# EAGLE board Qwiic Pi SHIM_S2-Panel (EAGLE 9.5.1), part 1 of 2
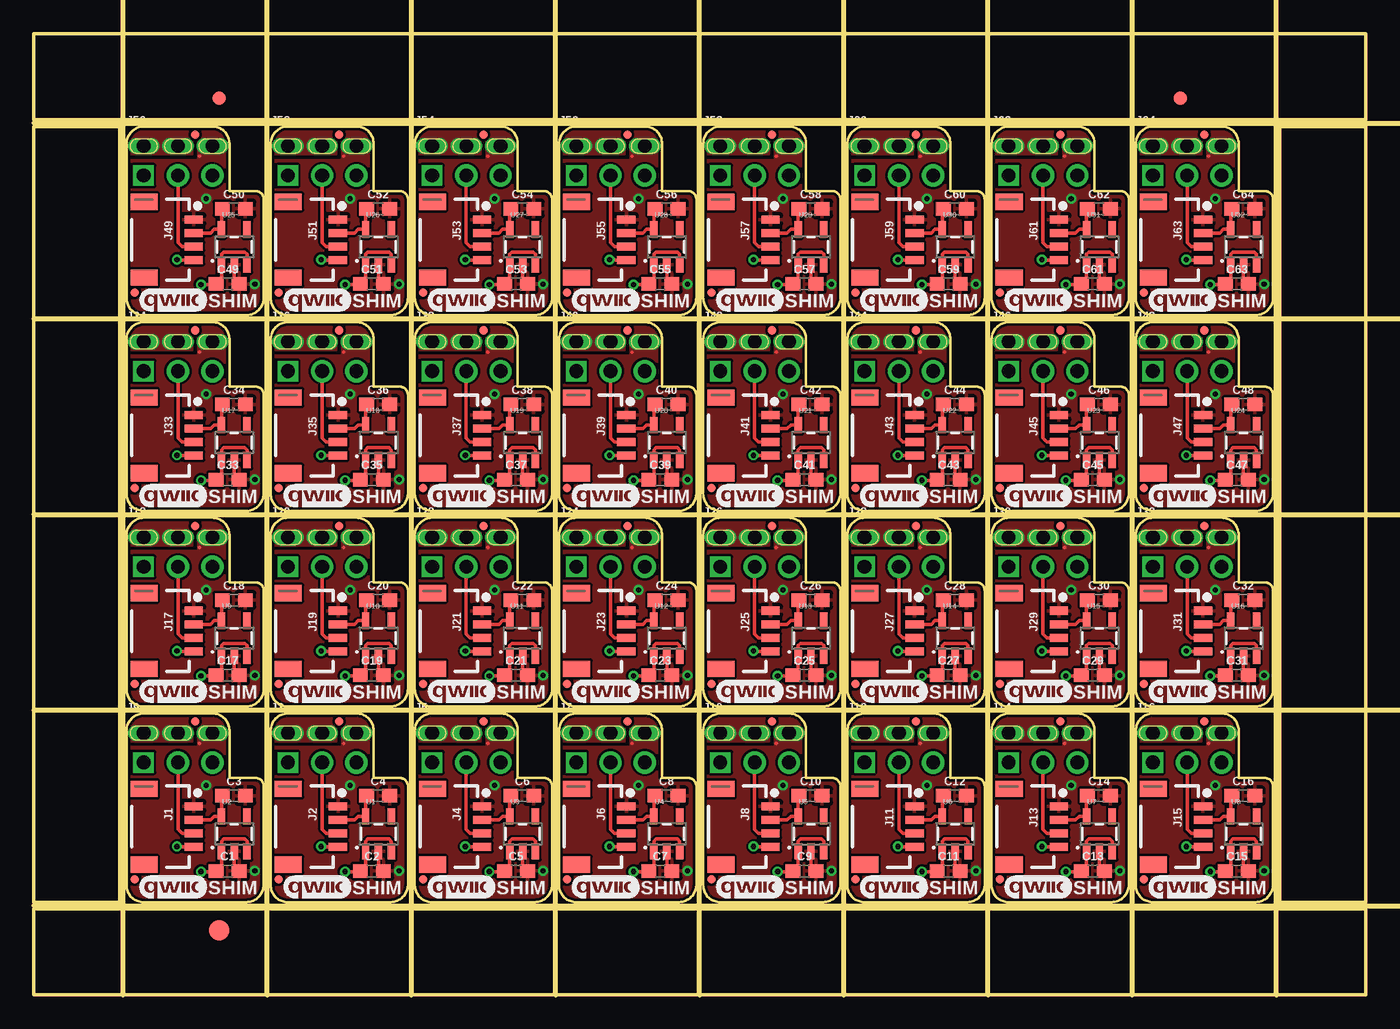
[diagram p0: board, top side]
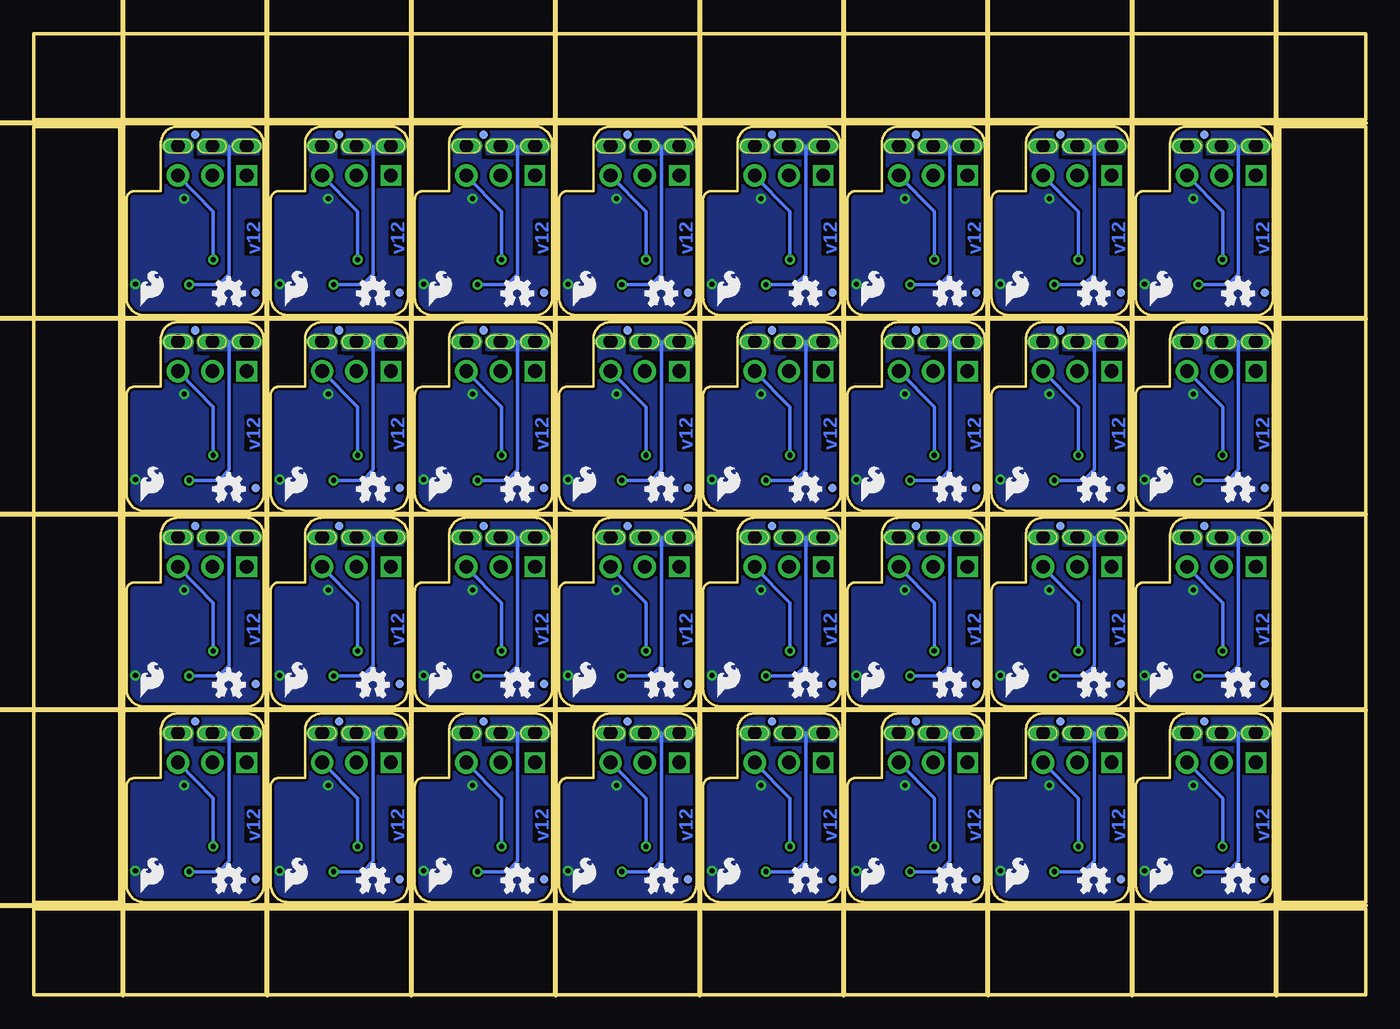
[diagram p1: board, bottom side, seen from below]

Size 98.55 x 71.12 mm. Coordinates in mm from the lower left corner, seen from the top.
Outline: 15.75,6.86 8.13,6.86 arc-90 6.86,8.13 6.86,19.56 arc-87 8.13,20.83 13.21,20.83 arc-90 14.48,19.56 14.48,16.05 16.38,16.05 arc-90 17.02,15.44 17.02,8.13 arc-87 15.75,6.86
Outline: 26.42,6.86 18.8,6.86 arc-90 17.53,8.13 17.53,19.56 arc-87 18.8,20.83 23.88,20.83 arc-90 25.15,19.56 25.15,16.05 27.05,16.05 arc-90 27.69,15.44 27.69,8.13 arc-87 26.42,6.86
Outline: 37.08,6.86 29.46,6.86 arc-90 28.19,8.13 28.19,19.56 arc-87 29.46,20.83 34.54,20.83 arc-90 35.81,19.56 35.81,16.05 37.72,16.05 arc-90 38.35,15.44 38.35,8.13 arc-87 37.08,6.86
Outline: 47.75,6.86 40.13,6.86 arc-90 38.86,8.13 38.86,19.56 arc-87 40.13,20.83 45.21,20.83 arc-90 46.48,19.56 46.48,16.05 48.39,16.05 arc-90 49.02,15.44 49.02,8.13 arc-87 47.75,6.86
Outline: 58.42,6.86 50.8,6.86 arc-90 49.53,8.13 49.53,19.56 arc-87 50.8,20.83 55.88,20.83 arc-90 57.15,19.56 57.15,16.05 59.05,16.05 arc-90 59.69,15.44 59.69,8.13 arc-87 58.42,6.86
Outline: 69.09,6.86 61.47,6.86 arc-90 60.2,8.13 60.2,19.56 arc-87 61.47,20.83 66.55,20.83 arc-90 67.82,19.56 67.82,16.05 69.72,16.05 arc-90 70.36,15.44 70.36,8.13 arc-87 69.09,6.86
Outline: 79.76,6.86 72.14,6.86 arc-90 70.87,8.13 70.87,19.56 arc-87 72.14,20.83 77.22,20.83 arc-90 78.49,19.56 78.49,16.05 80.39,16.05 arc-90 81.03,15.44 81.03,8.13 arc-87 79.76,6.86
Outline: 90.42,6.86 82.8,6.86 arc-90 81.53,8.13 81.53,19.56 arc-87 82.8,20.83 87.88,20.83 arc-90 89.15,19.56 89.15,16.05 91.06,16.05 arc-90 91.69,15.44 91.69,8.13 arc-87 90.42,6.86
Outline: 15.75,21.34 8.13,21.34 arc-90 6.86,22.61 6.86,34.04 arc-87 8.13,35.31 13.21,35.31 arc-90 14.48,34.04 14.48,30.53 16.38,30.53 arc-90 17.02,29.92 17.02,22.61 arc-87 15.75,21.34
Outline: 26.42,21.34 18.8,21.34 arc-90 17.53,22.61 17.53,34.04 arc-87 18.8,35.31 23.88,35.31 arc-90 25.15,34.04 25.15,30.53 27.05,30.53 arc-90 27.69,29.92 27.69,22.61 arc-87 26.42,21.34
Outline: 37.08,21.34 29.46,21.34 arc-90 28.19,22.61 28.19,34.04 arc-87 29.46,35.31 34.54,35.31 arc-90 35.81,34.04 35.81,30.53 37.72,30.53 arc-90 38.35,29.92 38.35,22.61 arc-87 37.08,21.34
Outline: 47.75,21.34 40.13,21.34 arc-90 38.86,22.61 38.86,34.04 arc-87 40.13,35.31 45.21,35.31 arc-90 46.48,34.04 46.48,30.53 48.39,30.53 arc-90 49.02,29.92 49.02,22.61 arc-87 47.75,21.34
Outline: 58.42,21.34 50.8,21.34 arc-90 49.53,22.61 49.53,34.04 arc-87 50.8,35.31 55.88,35.31 arc-90 57.15,34.04 57.15,30.53 59.05,30.53 arc-90 59.69,29.92 59.69,22.61 arc-87 58.42,21.34
Outline: 69.09,21.34 61.47,21.34 arc-90 60.2,22.61 60.2,34.04 arc-87 61.47,35.31 66.55,35.31 arc-90 67.82,34.04 67.82,30.53 69.72,30.53 arc-90 70.36,29.92 70.36,22.61 arc-87 69.09,21.34
Outline: 79.76,21.34 72.14,21.34 arc-90 70.87,22.61 70.87,34.04 arc-87 72.14,35.31 77.22,35.31 arc-90 78.49,34.04 78.49,30.53 80.39,30.53 arc-90 81.03,29.92 81.03,22.61 arc-87 79.76,21.34
Outline: 90.42,21.34 82.8,21.34 arc-90 81.53,22.61 81.53,34.04 arc-87 82.8,35.31 87.88,35.31 arc-90 89.15,34.04 89.15,30.53 91.06,30.53 arc-90 91.69,29.92 91.69,22.61 arc-87 90.42,21.34
Outline: 15.75,35.81 8.13,35.81 arc-90 6.86,37.08 6.86,48.51 arc-87 8.13,49.78 13.21,49.78 arc-90 14.48,48.51 14.48,45.01 16.38,45.01 arc-90 17.02,44.4 17.02,37.08 arc-87 15.75,35.81
Outline: 26.42,35.81 18.8,35.81 arc-90 17.53,37.08 17.53,48.51 arc-87 18.8,49.78 23.88,49.78 arc-90 25.15,48.51 25.15,45.01 27.05,45.01 arc-90 27.69,44.4 27.69,37.08 arc-87 26.42,35.81
Outline: 37.08,35.81 29.46,35.81 arc-90 28.19,37.08 28.19,48.51 arc-87 29.46,49.78 34.54,49.78 arc-90 35.81,48.51 35.81,45.01 37.72,45.01 arc-90 38.35,44.4 38.35,37.08 arc-87 37.08,35.81
Outline: 47.75,35.81 40.13,35.81 arc-90 38.86,37.08 38.86,48.51 arc-87 40.13,49.78 45.21,49.78 arc-90 46.48,48.51 46.48,45.01 48.39,45.01 arc-90 49.02,44.4 49.02,37.08 arc-87 47.75,35.81
Outline: 58.42,35.81 50.8,35.81 arc-90 49.53,37.08 49.53,48.51 arc-87 50.8,49.78 55.88,49.78 arc-90 57.15,48.51 57.15,45.01 59.05,45.01 arc-90 59.69,44.4 59.69,37.08 arc-87 58.42,35.81
Outline: 69.09,35.81 61.47,35.81 arc-90 60.2,37.08 60.2,48.51 arc-87 61.47,49.78 66.55,49.78 arc-90 67.82,48.51 67.82,45.01 69.72,45.01 arc-90 70.36,44.4 70.36,37.08 arc-87 69.09,35.81
Outline: 79.76,35.81 72.14,35.81 arc-90 70.87,37.08 70.87,48.51 arc-87 72.14,49.78 77.22,49.78 arc-90 78.49,48.51 78.49,45.01 80.39,45.01 arc-90 81.03,44.4 81.03,37.08 arc-87 79.76,35.81
Outline: 90.42,35.81 82.8,35.81 arc-90 81.53,37.08 81.53,48.51 arc-87 82.8,49.78 87.88,49.78 arc-90 89.15,48.51 89.15,45.01 91.06,45.01 arc-90 91.69,44.4 91.69,37.08 arc-87 90.42,35.81
Outline: 15.75,50.29 8.13,50.29 arc-90 6.86,51.56 6.86,62.99 arc-87 8.13,64.26 13.21,64.26 arc-90 14.48,62.99 14.48,59.49 16.38,59.49 arc-90 17.02,58.88 17.02,51.56 arc-87 15.75,50.29
Outline: 26.42,50.29 18.8,50.29 arc-90 17.53,51.56 17.53,62.99 arc-87 18.8,64.26 23.88,64.26 arc-90 25.15,62.99 25.15,59.49 27.05,59.49 arc-90 27.69,58.88 27.69,51.56 arc-87 26.42,50.29
Outline: 37.08,50.29 29.46,50.29 arc-90 28.19,51.56 28.19,62.99 arc-87 29.46,64.26 34.54,64.26 arc-90 35.81,62.99 35.81,59.49 37.72,59.49 arc-90 38.35,58.88 38.35,51.56 arc-87 37.08,50.29
Outline: 47.75,50.29 40.13,50.29 arc-90 38.86,51.56 38.86,62.99 arc-87 40.13,64.26 45.21,64.26 arc-90 46.48,62.99 46.48,59.49 48.39,59.49 arc-90 49.02,58.88 49.02,51.56 arc-87 47.75,50.29
Outline: 58.42,50.29 50.8,50.29 arc-90 49.53,51.56 49.53,62.99 arc-87 50.8,64.26 55.88,64.26 arc-90 57.15,62.99 57.15,59.49 59.05,59.49 arc-90 59.69,58.88 59.69,51.56 arc-87 58.42,50.29
Outline: 69.09,50.29 61.47,50.29 arc-90 60.2,51.56 60.2,62.99 arc-87 61.47,64.26 66.55,64.26 arc-90 67.82,62.99 67.82,59.49 69.72,59.49 arc-90 70.36,58.88 70.36,51.56 arc-87 69.09,50.29
Outline: 79.76,50.29 72.14,50.29 arc-90 70.87,51.56 70.87,62.99 arc-87 72.14,64.26 77.22,64.26 arc-90 78.49,62.99 78.49,59.49 80.39,59.49 arc-90 81.03,58.88 81.03,51.56 arc-87 79.76,50.29
Outline: 90.42,50.29 82.8,50.29 arc-90 81.53,51.56 81.53,62.99 arc-87 82.8,64.26 87.88,64.26 arc-90 89.15,62.99 89.15,59.49 91.06,59.49 arc-90 91.69,58.88 91.69,51.56 arc-87 90.42,50.29
Outline: 0,6.35 98.55,6.35 98.55,0 0,0 0,6.35
Outline: 92.2,64.26 98.55,64.26 98.55,6.86 92.2,6.86 92.2,64.26
Outline: 0,71.12 98.55,71.12 98.55,64.77 0,64.77 0,71.12
Outline: 0,64.26 6.35,64.26 6.35,6.86 0,6.86 0,64.26
Copper layers (1*16): Top 0.035mm / dielectric 1.5mm / Bottom 0.035mm
Design rules "SparkFun-2-layer-TIGHT *": minimum track width 7mil, minimum drill 15mil, track to track 7mil, track to pad 7mil, pad to pad 7mil, via to via 7mil, smd to smd 7mil, copper to edge 7mil, drill to drill 7mil, minimum pad ring 2mil, minimum via ring 7mil, stop-mask expansion 4mil, vias tented up to drill 25mil, thermal gap 10mil
Net classes: 0 Default: width 0.178 mm; 1 vcc: width 0.178 mm
Milling: 14 lines

## Footprints (pad centres in the part's own frame; a part is rotated, then mirrored left to right if it is on the bottom)
0603 = smd 1.1 x 1: 1 -0.85,0; 2 0.85,0
FIDUCIAL-1X2 = smd 1 x 1: 1 0,0
FIDUCIAL-1.5X3 = smd 1.5 x 1.5: 1 0,0
FIDUCIAL-MICRO = smd 0.635 x 0.635: 1 0,0
1X04_1MM_RA = smd 0.6 x 1.35: 1 -1.5,0; 2 -0.5,0; 3 0.5,0; 4 1.5,0 | smd 1.2 x 2: NC1 2.8,-3.675; NC2 -2.8,-3.675
SPARKFUN-CONNECTORS_2X3-NS_PISHIM_LOCKING_SLOTS-2MILS = drill 1.016 pad 1.524 square: 1 -2.54,-1.092 | drill 1.016 pad 1.168 long: 2 -2.54,1.092; 4 0,1.092; 6 2.54,1.092 | drill 1.016 pad 1.651: 3 0,-1.092; 5 2.54,-1.092
SOT23-5 = smd 0.55 x 1.2: 1 -0.95,-1.3; 2 0,-1.3; 3 0.95,-1.3; 4 0.95,1.3; 5 -0.95,1.3

## Placement (x,y rotation side)
C1  1.0uF  [0603]  14.35,9.17 0 top
C2  1.0uF  [0603]  25.02,9.17 0 top
C3  1.0uF  [0603]  14.81,14.73 0 top
C4  1.0uF  [0603]  25.48,14.73 0 top
C5  1.0uF  [0603]  35.69,9.17 0 top
C6  1.0uF  [0603]  36.14,14.73 0 top
C7  1.0uF  [0603]  46.35,9.17 0 top
C8  1.0uF  [0603]  46.81,14.73 0 top
C9  1.0uF  [0603]  57.02,9.17 0 top
C10  1.0uF  [0603]  57.48,14.73 0 top
C11  1.0uF  [0603]  67.69,9.17 0 top
C12  1.0uF  [0603]  68.15,14.73 0 top
C13  1.0uF  [0603]  78.36,9.17 0 top
C14  1.0uF  [0603]  78.82,14.73 0 top
C15  1.0uF  [0603]  89.03,9.17 0 top
C16  1.0uF  [0603]  89.48,14.73 0 top
C17  1.0uF  [0603]  14.35,23.65 0 top
C18  1.0uF  [0603]  14.81,29.21 0 top
C19  1.0uF  [0603]  25.02,23.65 0 top
C20  1.0uF  [0603]  25.48,29.21 0 top
C21  1.0uF  [0603]  35.69,23.65 0 top
C22  1.0uF  [0603]  36.14,29.21 0 top
C23  1.0uF  [0603]  46.35,23.65 0 top
C24  1.0uF  [0603]  46.81,29.21 0 top
C25  1.0uF  [0603]  57.02,23.65 0 top
C26  1.0uF  [0603]  57.48,29.21 0 top
C27  1.0uF  [0603]  67.69,23.65 0 top
C28  1.0uF  [0603]  68.15,29.21 0 top
C29  1.0uF  [0603]  78.36,23.65 0 top
C30  1.0uF  [0603]  78.82,29.21 0 top
C31  1.0uF  [0603]  89.03,23.65 0 top
C32  1.0uF  [0603]  89.48,29.21 0 top
C33  1.0uF  [0603]  14.35,38.13 0 top
C34  1.0uF  [0603]  14.81,43.69 0 top
C35  1.0uF  [0603]  25.02,38.13 0 top
C36  1.0uF  [0603]  25.48,43.69 0 top
C37  1.0uF  [0603]  35.69,38.13 0 top
C38  1.0uF  [0603]  36.14,43.69 0 top
C39  1.0uF  [0603]  46.35,38.13 0 top
C40  1.0uF  [0603]  46.81,43.69 0 top
C41  1.0uF  [0603]  57.02,38.13 0 top
C42  1.0uF  [0603]  57.48,43.69 0 top
C43  1.0uF  [0603]  67.69,38.13 0 top
C44  1.0uF  [0603]  68.15,43.69 0 top
C45  1.0uF  [0603]  78.36,38.13 0 top
C46  1.0uF  [0603]  78.82,43.69 0 top
C47  1.0uF  [0603]  89.03,38.13 0 top
C48  1.0uF  [0603]  89.48,43.69 0 top
C49  1.0uF  [0603]  14.35,52.6 0 top
C50  1.0uF  [0603]  14.81,58.17 0 top
C51  1.0uF  [0603]  25.02,52.6 0 top
C52  1.0uF  [0603]  25.48,58.17 0 top
C53  1.0uF  [0603]  35.69,52.6 0 top
C54  1.0uF  [0603]  36.14,58.17 0 top
C55  1.0uF  [0603]  46.35,52.6 0 top
C56  1.0uF  [0603]  46.81,58.17 0 top
C57  1.0uF  [0603]  57.02,52.6 0 top
C58  1.0uF  [0603]  57.48,58.17 0 top
C59  1.0uF  [0603]  67.69,52.6 0 top
C60  1.0uF  [0603]  68.15,58.17 0 top
C61  1.0uF  [0603]  78.36,52.6 0 top
C62  1.0uF  [0603]  78.82,58.17 0 top
C63  1.0uF  [0603]  89.03,52.6 0 top
C64  1.0uF  [0603]  89.48,58.17 0 top
E$1  [FIDUCIAL-1X2]  13.72,66.36 0 top
E$2  [FIDUCIAL-1X2]  84.84,66.36 0 top
E$3  [FIDUCIAL-1.5X3]  13.72,4.76 0 top
FD1  FIDUCIALUFIDUCIAL  [FIDUCIAL-MICRO]  11.94,20.22 180 top
FD2  FIDUCIALUFIDUCIAL  [FIDUCIAL-MICRO]  7.47,8.53 180 top
FD3  FIDUCIALUFIDUCIAL  [FIDUCIAL-MICRO]  7.47,8.53 0 bottom
FD4  FIDUCIALUFIDUCIAL  [FIDUCIAL-MICRO]  11.94,20.22 0 bottom
FD5  FIDUCIALUFIDUCIAL  [FIDUCIAL-MICRO]  22.61,20.22 180 top
FD6  FIDUCIALUFIDUCIAL  [FIDUCIAL-MICRO]  18.14,8.53 180 top
FD7  FIDUCIALUFIDUCIAL  [FIDUCIAL-MICRO]  18.14,8.53 0 bottom
FD8  FIDUCIALUFIDUCIAL  [FIDUCIAL-MICRO]  22.61,20.22 0 bottom
FD9  FIDUCIALUFIDUCIAL  [FIDUCIAL-MICRO]  33.27,20.22 180 top
FD10  FIDUCIALUFIDUCIAL  [FIDUCIAL-MICRO]  28.8,8.53 180 top
FD11  FIDUCIALUFIDUCIAL  [FIDUCIAL-MICRO]  28.8,8.53 0 bottom
FD12  FIDUCIALUFIDUCIAL  [FIDUCIAL-MICRO]  33.27,20.22 0 bottom
FD13  FIDUCIALUFIDUCIAL  [FIDUCIAL-MICRO]  43.94,20.22 180 top
FD14  FIDUCIALUFIDUCIAL  [FIDUCIAL-MICRO]  39.47,8.53 180 top
FD15  FIDUCIALUFIDUCIAL  [FIDUCIAL-MICRO]  39.47,8.53 0 bottom
FD16  FIDUCIALUFIDUCIAL  [FIDUCIAL-MICRO]  43.94,20.22 0 bottom
FD17  FIDUCIALUFIDUCIAL  [FIDUCIAL-MICRO]  54.61,20.22 180 top
FD18  FIDUCIALUFIDUCIAL  [FIDUCIAL-MICRO]  50.14,8.53 180 top
FD19  FIDUCIALUFIDUCIAL  [FIDUCIAL-MICRO]  50.14,8.53 0 bottom
FD20  FIDUCIALUFIDUCIAL  [FIDUCIAL-MICRO]  54.61,20.22 0 bottom
FD21  FIDUCIALUFIDUCIAL  [FIDUCIAL-MICRO]  65.28,20.22 180 top
FD22  FIDUCIALUFIDUCIAL  [FIDUCIAL-MICRO]  60.81,8.53 180 top
FD23  FIDUCIALUFIDUCIAL  [FIDUCIAL-MICRO]  60.81,8.53 0 bottom
FD24  FIDUCIALUFIDUCIAL  [FIDUCIAL-MICRO]  65.28,20.22 0 bottom
FD25  FIDUCIALUFIDUCIAL  [FIDUCIAL-MICRO]  75.95,20.22 180 top
FD26  FIDUCIALUFIDUCIAL  [FIDUCIAL-MICRO]  71.48,8.53 180 top
FD27  FIDUCIALUFIDUCIAL  [FIDUCIAL-MICRO]  71.48,8.53 0 bottom
FD28  FIDUCIALUFIDUCIAL  [FIDUCIAL-MICRO]  75.95,20.22 0 bottom
FD29  FIDUCIALUFIDUCIAL  [FIDUCIAL-MICRO]  86.61,20.22 180 top
FD30  FIDUCIALUFIDUCIAL  [FIDUCIAL-MICRO]  82.14,8.53 180 top
FD31  FIDUCIALUFIDUCIAL  [FIDUCIAL-MICRO]  82.14,8.53 0 bottom
FD32  FIDUCIALUFIDUCIAL  [FIDUCIAL-MICRO]  86.61,20.22 0 bottom
FD33  FIDUCIALUFIDUCIAL  [FIDUCIAL-MICRO]  11.94,34.7 180 top
FD34  FIDUCIALUFIDUCIAL  [FIDUCIAL-MICRO]  7.47,23.01 180 top
FD35  FIDUCIALUFIDUCIAL  [FIDUCIAL-MICRO]  7.47,23.01 0 bottom
FD36  FIDUCIALUFIDUCIAL  [FIDUCIAL-MICRO]  11.94,34.7 0 bottom
FD37  FIDUCIALUFIDUCIAL  [FIDUCIAL-MICRO]  22.61,34.7 180 top
FD38  FIDUCIALUFIDUCIAL  [FIDUCIAL-MICRO]  18.14,23.01 180 top
FD39  FIDUCIALUFIDUCIAL  [FIDUCIAL-MICRO]  18.14,23.01 0 bottom
FD40  FIDUCIALUFIDUCIAL  [FIDUCIAL-MICRO]  22.61,34.7 0 bottom
FD41  FIDUCIALUFIDUCIAL  [FIDUCIAL-MICRO]  33.27,34.7 180 top
FD42  FIDUCIALUFIDUCIAL  [FIDUCIAL-MICRO]  28.8,23.01 180 top
FD43  FIDUCIALUFIDUCIAL  [FIDUCIAL-MICRO]  28.8,23.01 0 bottom
FD44  FIDUCIALUFIDUCIAL  [FIDUCIAL-MICRO]  33.27,34.7 0 bottom
FD45  FIDUCIALUFIDUCIAL  [FIDUCIAL-MICRO]  43.94,34.7 180 top
FD46  FIDUCIALUFIDUCIAL  [FIDUCIAL-MICRO]  39.47,23.01 180 top
FD47  FIDUCIALUFIDUCIAL  [FIDUCIAL-MICRO]  39.47,23.01 0 bottom
FD48  FIDUCIALUFIDUCIAL  [FIDUCIAL-MICRO]  43.94,34.7 0 bottom
FD49  FIDUCIALUFIDUCIAL  [FIDUCIAL-MICRO]  54.61,34.7 180 top
FD50  FIDUCIALUFIDUCIAL  [FIDUCIAL-MICRO]  50.14,23.01 180 top
FD51  FIDUCIALUFIDUCIAL  [FIDUCIAL-MICRO]  50.14,23.01 0 bottom
FD52  FIDUCIALUFIDUCIAL  [FIDUCIAL-MICRO]  54.61,34.7 0 bottom
FD53  FIDUCIALUFIDUCIAL  [FIDUCIAL-MICRO]  65.28,34.7 180 top
FD54  FIDUCIALUFIDUCIAL  [FIDUCIAL-MICRO]  60.81,23.01 180 top
FD55  FIDUCIALUFIDUCIAL  [FIDUCIAL-MICRO]  60.81,23.01 0 bottom
FD56  FIDUCIALUFIDUCIAL  [FIDUCIAL-MICRO]  65.28,34.7 0 bottom
FD57  FIDUCIALUFIDUCIAL  [FIDUCIAL-MICRO]  75.95,34.7 180 top
FD58  FIDUCIALUFIDUCIAL  [FIDUCIAL-MICRO]  71.48,23.01 180 top
FD59  FIDUCIALUFIDUCIAL  [FIDUCIAL-MICRO]  71.48,23.01 0 bottom
FD60  FIDUCIALUFIDUCIAL  [FIDUCIAL-MICRO]  75.95,34.7 0 bottom
FD61  FIDUCIALUFIDUCIAL  [FIDUCIAL-MICRO]  86.61,34.7 180 top
FD62  FIDUCIALUFIDUCIAL  [FIDUCIAL-MICRO]  82.14,23.01 180 top
FD63  FIDUCIALUFIDUCIAL  [FIDUCIAL-MICRO]  82.14,23.01 0 bottom
FD64  FIDUCIALUFIDUCIAL  [FIDUCIAL-MICRO]  86.61,34.7 0 bottom
FD65  FIDUCIALUFIDUCIAL  [FIDUCIAL-MICRO]  11.94,49.17 180 top
FD66  FIDUCIALUFIDUCIAL  [FIDUCIAL-MICRO]  7.47,37.49 180 top
FD67  FIDUCIALUFIDUCIAL  [FIDUCIAL-MICRO]  7.47,37.49 0 bottom
FD68  FIDUCIALUFIDUCIAL  [FIDUCIAL-MICRO]  11.94,49.17 0 bottom
FD69  FIDUCIALUFIDUCIAL  [FIDUCIAL-MICRO]  22.61,49.17 180 top
FD70  FIDUCIALUFIDUCIAL  [FIDUCIAL-MICRO]  18.14,37.49 180 top
FD71  FIDUCIALUFIDUCIAL  [FIDUCIAL-MICRO]  18.14,37.49 0 bottom
FD72  FIDUCIALUFIDUCIAL  [FIDUCIAL-MICRO]  22.61,49.17 0 bottom
FD73  FIDUCIALUFIDUCIAL  [FIDUCIAL-MICRO]  33.27,49.17 180 top
FD74  FIDUCIALUFIDUCIAL  [FIDUCIAL-MICRO]  28.8,37.49 180 top
FD75  FIDUCIALUFIDUCIAL  [FIDUCIAL-MICRO]  28.8,37.49 0 bottom
FD76  FIDUCIALUFIDUCIAL  [FIDUCIAL-MICRO]  33.27,49.17 0 bottom
FD77  FIDUCIALUFIDUCIAL  [FIDUCIAL-MICRO]  43.94,49.17 180 top
FD78  FIDUCIALUFIDUCIAL  [FIDUCIAL-MICRO]  39.47,37.49 180 top
FD79  FIDUCIALUFIDUCIAL  [FIDUCIAL-MICRO]  39.47,37.49 0 bottom
FD80  FIDUCIALUFIDUCIAL  [FIDUCIAL-MICRO]  43.94,49.17 0 bottom
FD81  FIDUCIALUFIDUCIAL  [FIDUCIAL-MICRO]  54.61,49.17 180 top
FD82  FIDUCIALUFIDUCIAL  [FIDUCIAL-MICRO]  50.14,37.49 180 top
FD83  FIDUCIALUFIDUCIAL  [FIDUCIAL-MICRO]  50.14,37.49 0 bottom
FD84  FIDUCIALUFIDUCIAL  [FIDUCIAL-MICRO]  54.61,49.17 0 bottom
FD85  FIDUCIALUFIDUCIAL  [FIDUCIAL-MICRO]  65.28,49.17 180 top
FD86  FIDUCIALUFIDUCIAL  [FIDUCIAL-MICRO]  60.81,37.49 180 top
FD87  FIDUCIALUFIDUCIAL  [FIDUCIAL-MICRO]  60.81,37.49 0 bottom
FD88  FIDUCIALUFIDUCIAL  [FIDUCIAL-MICRO]  65.28,49.17 0 bottom
FD89  FIDUCIALUFIDUCIAL  [FIDUCIAL-MICRO]  75.95,49.17 180 top
FD90  FIDUCIALUFIDUCIAL  [FIDUCIAL-MICRO]  71.48,37.49 180 top
FD91  FIDUCIALUFIDUCIAL  [FIDUCIAL-MICRO]  71.48,37.49 0 bottom
FD92  FIDUCIALUFIDUCIAL  [FIDUCIAL-MICRO]  75.95,49.17 0 bottom
FD93  FIDUCIALUFIDUCIAL  [FIDUCIAL-MICRO]  86.61,49.17 180 top
FD94  FIDUCIALUFIDUCIAL  [FIDUCIAL-MICRO]  82.14,37.49 180 top
FD95  FIDUCIALUFIDUCIAL  [FIDUCIAL-MICRO]  82.14,37.49 0 bottom
FD96  FIDUCIALUFIDUCIAL  [FIDUCIAL-MICRO]  86.61,49.17 0 bottom
FD97  FIDUCIALUFIDUCIAL  [FIDUCIAL-MICRO]  11.94,63.65 180 top
FD98  FIDUCIALUFIDUCIAL  [FIDUCIAL-MICRO]  7.47,51.97 180 top
FD99  FIDUCIALUFIDUCIAL  [FIDUCIAL-MICRO]  7.47,51.97 0 bottom
FD100  FIDUCIALUFIDUCIAL  [FIDUCIAL-MICRO]  11.94,63.65 0 bottom
FD101  FIDUCIALUFIDUCIAL  [FIDUCIAL-MICRO]  22.61,63.65 180 top
FD102  FIDUCIALUFIDUCIAL  [FIDUCIAL-MICRO]  18.14,51.97 180 top
FD103  FIDUCIALUFIDUCIAL  [FIDUCIAL-MICRO]  18.14,51.97 0 bottom
FD104  FIDUCIALUFIDUCIAL  [FIDUCIAL-MICRO]  22.61,63.65 0 bottom
FD105  FIDUCIALUFIDUCIAL  [FIDUCIAL-MICRO]  33.27,63.65 180 top
FD106  FIDUCIALUFIDUCIAL  [FIDUCIAL-MICRO]  28.8,51.97 180 top
FD107  FIDUCIALUFIDUCIAL  [FIDUCIAL-MICRO]  28.8,51.97 0 bottom
FD108  FIDUCIALUFIDUCIAL  [FIDUCIAL-MICRO]  33.27,63.65 0 bottom
FD109  FIDUCIALUFIDUCIAL  [FIDUCIAL-MICRO]  43.94,63.65 180 top
FD110  FIDUCIALUFIDUCIAL  [FIDUCIAL-MICRO]  39.47,51.97 180 top
FD111  FIDUCIALUFIDUCIAL  [FIDUCIAL-MICRO]  39.47,51.97 0 bottom
FD112  FIDUCIALUFIDUCIAL  [FIDUCIAL-MICRO]  43.94,63.65 0 bottom
FD113  FIDUCIALUFIDUCIAL  [FIDUCIAL-MICRO]  54.61,63.65 180 top
FD114  FIDUCIALUFIDUCIAL  [FIDUCIAL-MICRO]  50.14,51.97 180 top
FD115  FIDUCIALUFIDUCIAL  [FIDUCIAL-MICRO]  50.14,51.97 0 bottom
FD116  FIDUCIALUFIDUCIAL  [FIDUCIAL-MICRO]  54.61,63.65 0 bottom
FD117  FIDUCIALUFIDUCIAL  [FIDUCIAL-MICRO]  65.28,63.65 180 top
FD118  FIDUCIALUFIDUCIAL  [FIDUCIAL-MICRO]  60.81,51.97 180 top
FD119  FIDUCIALUFIDUCIAL  [FIDUCIAL-MICRO]  60.81,51.97 0 bottom
FD120  FIDUCIALUFIDUCIAL  [FIDUCIAL-MICRO]  65.28,63.65 0 bottom
FD121  FIDUCIALUFIDUCIAL  [FIDUCIAL-MICRO]  75.95,63.65 180 top
FD122  FIDUCIALUFIDUCIAL  [FIDUCIAL-MICRO]  71.48,51.97 180 top
FD123  FIDUCIALUFIDUCIAL  [FIDUCIAL-MICRO]  71.48,51.97 0 bottom
FD124  FIDUCIALUFIDUCIAL  [FIDUCIAL-MICRO]  75.95,63.65 0 bottom
FD125  FIDUCIALUFIDUCIAL  [FIDUCIAL-MICRO]  86.61,63.65 180 top
FD126  FIDUCIALUFIDUCIAL  [FIDUCIAL-MICRO]  82.14,51.97 180 top
FD127  FIDUCIALUFIDUCIAL  [FIDUCIAL-MICRO]  82.14,51.97 0 bottom
FD128  FIDUCIALUFIDUCIAL  [FIDUCIAL-MICRO]  86.61,63.65 0 bottom
J1  Qwiic Right Angle  [1X04_1MM_RA]  11.84,12.45 270 top
J2  Qwiic Right Angle  [1X04_1MM_RA]  22.5,12.45 270 top
J3  [SPARKFUN-CONNECTORS_2X3-NS_PISHIM_LOCKING_SLOTS-2MILS]  21.34,18.29 0 top
J4  Qwiic Right Angle  [1X04_1MM_RA]  33.17,12.45 270 top
J5  [SPARKFUN-CONNECTORS_2X3-NS_PISHIM_LOCKING_SLOTS-2MILS]  32,18.29 0 top
J6  Qwiic Right Angle  [1X04_1MM_RA]  43.84,12.45 270 top
J7  [SPARKFUN-CONNECTORS_2X3-NS_PISHIM_LOCKING_SLOTS-2MILS]  42.67,18.29 0 top
J8  Qwiic Right Angle  [1X04_1MM_RA]  54.51,12.45 270 top
J9  [SPARKFUN-CONNECTORS_2X3-NS_PISHIM_LOCKING_SLOTS-2MILS]  10.67,18.29 0 top
J10  [SPARKFUN-CONNECTORS_2X3-NS_PISHIM_LOCKING_SLOTS-2MILS]  53.34,18.29 0 top
J11  Qwiic Right Angle  [1X04_1MM_RA]  65.18,12.45 270 top
J12  [SPARKFUN-CONNECTORS_2X3-NS_PISHIM_LOCKING_SLOTS-2MILS]  64.01,18.29 0 top
J13  Qwiic Right Angle  [1X04_1MM_RA]  75.84,12.45 270 top
J14  [SPARKFUN-CONNECTORS_2X3-NS_PISHIM_LOCKING_SLOTS-2MILS]  74.68,18.29 0 top
J15  Qwiic Right Angle  [1X04_1MM_RA]  86.51,12.45 270 top
J16  [SPARKFUN-CONNECTORS_2X3-NS_PISHIM_LOCKING_SLOTS-2MILS]  85.34,18.29 0 top
J17  Qwiic Right Angle  [1X04_1MM_RA]  11.84,26.92 270 top
J18  [SPARKFUN-CONNECTORS_2X3-NS_PISHIM_LOCKING_SLOTS-2MILS]  10.67,32.77 0 top
J19  Qwiic Right Angle  [1X04_1MM_RA]  22.5,26.92 270 top
J20  [SPARKFUN-CONNECTORS_2X3-NS_PISHIM_LOCKING_SLOTS-2MILS]  21.34,32.77 0 top
J21  Qwiic Right Angle  [1X04_1MM_RA]  33.17,26.92 270 top
J22  [SPARKFUN-CONNECTORS_2X3-NS_PISHIM_LOCKING_SLOTS-2MILS]  32,32.77 0 top
J23  Qwiic Right Angle  [1X04_1MM_RA]  43.84,26.92 270 top
J24  [SPARKFUN-CONNECTORS_2X3-NS_PISHIM_LOCKING_SLOTS-2MILS]  42.67,32.77 0 top
J25  Qwiic Right Angle  [1X04_1MM_RA]  54.51,26.92 270 top
J26  [SPARKFUN-CONNECTORS_2X3-NS_PISHIM_LOCKING_SLOTS-2MILS]  53.34,32.77 0 top
J27  Qwiic Right Angle  [1X04_1MM_RA]  65.18,26.92 270 top
J28  [SPARKFUN-CONNECTORS_2X3-NS_PISHIM_LOCKING_SLOTS-2MILS]  64.01,32.77 0 top
J29  Qwiic Right Angle  [1X04_1MM_RA]  75.84,26.92 270 top
J30  [SPARKFUN-CONNECTORS_2X3-NS_PISHIM_LOCKING_SLOTS-2MILS]  74.68,32.77 0 top
J31  Qwiic Right Angle  [1X04_1MM_RA]  86.51,26.92 270 top
J32  [SPARKFUN-CONNECTORS_2X3-NS_PISHIM_LOCKING_SLOTS-2MILS]  85.34,32.77 0 top
J33  Qwiic Right Angle  [1X04_1MM_RA]  11.84,41.4 270 top
J34  [SPARKFUN-CONNECTORS_2X3-NS_PISHIM_LOCKING_SLOTS-2MILS]  10.67,47.24 0 top
J35  Qwiic Right Angle  [1X04_1MM_RA]  22.5,41.4 270 top
J36  [SPARKFUN-CONNECTORS_2X3-NS_PISHIM_LOCKING_SLOTS-2MILS]  21.34,47.24 0 top
J37  Qwiic Right Angle  [1X04_1MM_RA]  33.17,41.4 270 top
J38  [SPARKFUN-CONNECTORS_2X3-NS_PISHIM_LOCKING_SLOTS-2MILS]  32,47.24 0 top
J39  Qwiic Right Angle  [1X04_1MM_RA]  43.84,41.4 270 top
J40  [SPARKFUN-CONNECTORS_2X3-NS_PISHIM_LOCKING_SLOTS-2MILS]  42.67,47.24 0 top
J41  Qwiic Right Angle  [1X04_1MM_RA]  54.51,41.4 270 top
J42  [SPARKFUN-CONNECTORS_2X3-NS_PISHIM_LOCKING_SLOTS-2MILS]  53.34,47.24 0 top
J43  Qwiic Right Angle  [1X04_1MM_RA]  65.18,41.4 270 top
J44  [SPARKFUN-CONNECTORS_2X3-NS_PISHIM_LOCKING_SLOTS-2MILS]  64.01,47.24 0 top
J45  Qwiic Right Angle  [1X04_1MM_RA]  75.84,41.4 270 top
J46  [SPARKFUN-CONNECTORS_2X3-NS_PISHIM_LOCKING_SLOTS-2MILS]  74.68,47.24 0 top
J47  Qwiic Right Angle  [1X04_1MM_RA]  86.51,41.4 270 top
J48  [SPARKFUN-CONNECTORS_2X3-NS_PISHIM_LOCKING_SLOTS-2MILS]  85.34,47.24 0 top
J49  Qwiic Right Angle  [1X04_1MM_RA]  11.84,55.88 270 top
J50  [SPARKFUN-CONNECTORS_2X3-NS_PISHIM_LOCKING_SLOTS-2MILS]  10.67,61.72 0 top
J51  Qwiic Right Angle  [1X04_1MM_RA]  22.5,55.88 270 top
J52  [SPARKFUN-CONNECTORS_2X3-NS_PISHIM_LOCKING_SLOTS-2MILS]  21.34,61.72 0 top
J53  Qwiic Right Angle  [1X04_1MM_RA]  33.17,55.88 270 top
J54  [SPARKFUN-CONNECTORS_2X3-NS_PISHIM_LOCKING_SLOTS-2MILS]  32,61.72 0 top
J55  Qwiic Right Angle  [1X04_1MM_RA]  43.84,55.88 270 top
J56  [SPARKFUN-CONNECTORS_2X3-NS_PISHIM_LOCKING_SLOTS-2MILS]  42.67,61.72 0 top
J57  Qwiic Right Angle  [1X04_1MM_RA]  54.51,55.88 270 top
J58  [SPARKFUN-CONNECTORS_2X3-NS_PISHIM_LOCKING_SLOTS-2MILS]  53.34,61.72 0 top
J59  Qwiic Right Angle  [1X04_1MM_RA]  65.18,55.88 270 top
J60  [SPARKFUN-CONNECTORS_2X3-NS_PISHIM_LOCKING_SLOTS-2MILS]  64.01,61.72 0 top
J61  Qwiic Right Angle  [1X04_1MM_RA]  75.84,55.88 270 top
J62  [SPARKFUN-CONNECTORS_2X3-NS_PISHIM_LOCKING_SLOTS-2MILS]  74.68,61.72 0 top
J63  Qwiic Right Angle  [1X04_1MM_RA]  86.51,55.88 270 top
J64  [SPARKFUN-CONNECTORS_2X3-NS_PISHIM_LOCKING_SLOTS-2MILS]  85.34,61.72 0 top
LOGO1  OSHW-LOGOMINI  [OSHW-LOGO-MINI]  9.45,8.48 0 bottom
LOGO2  OSHW-LOGOMINI  [OSHW-LOGO-MINI]  20.12,8.48 0 bottom
LOGO3  OSHW-LOGOMINI  [OSHW-LOGO-MINI]  30.78,8.48 0 bottom
LOGO4  OSHW-LOGOMINI  [OSHW-LOGO-MINI]  41.45,8.48 0 bottom
LOGO5  OSHW-LOGOMINI  [OSHW-LOGO-MINI]  52.12,8.48 0 bottom
LOGO6  OSHW-LOGOMINI  [OSHW-LOGO-MINI]  62.79,8.48 0 bottom
LOGO7  OSHW-LOGOMINI  [OSHW-LOGO-MINI]  73.46,8.48 0 bottom
LOGO8  OSHW-LOGOMINI  [OSHW-LOGO-MINI]  84.12,8.48 0 bottom
LOGO9  OSHW-LOGOMINI  [OSHW-LOGO-MINI]  9.45,22.96 0 bottom
LOGO10  OSHW-LOGOMINI  [OSHW-LOGO-MINI]  20.12,22.96 0 bottom
LOGO11  OSHW-LOGOMINI  [OSHW-LOGO-MINI]  30.78,22.96 0 bottom
LOGO12  OSHW-LOGOMINI  [OSHW-LOGO-MINI]  41.45,22.96 0 bottom
LOGO13  OSHW-LOGOMINI  [OSHW-LOGO-MINI]  52.12,22.96 0 bottom
LOGO14  OSHW-LOGOMINI  [OSHW-LOGO-MINI]  62.79,22.96 0 bottom
LOGO15  OSHW-LOGOMINI  [OSHW-LOGO-MINI]  73.46,22.96 0 bottom
LOGO16  OSHW-LOGOMINI  [OSHW-LOGO-MINI]  84.12,22.96 0 bottom
LOGO17  OSHW-LOGOMINI  [OSHW-LOGO-MINI]  9.45,37.44 0 bottom
LOGO18  OSHW-LOGOMINI  [OSHW-LOGO-MINI]  20.12,37.44 0 bottom
LOGO19  OSHW-LOGOMINI  [OSHW-LOGO-MINI]  30.78,37.44 0 bottom
LOGO20  OSHW-LOGOMINI  [OSHW-LOGO-MINI]  41.45,37.44 0 bottom
LOGO21  OSHW-LOGOMINI  [OSHW-LOGO-MINI]  52.12,37.44 0 bottom
LOGO22  OSHW-LOGOMINI  [OSHW-LOGO-MINI]  62.79,37.44 0 bottom
LOGO23  OSHW-LOGOMINI  [OSHW-LOGO-MINI]  73.46,37.44 0 bottom
LOGO24  OSHW-LOGOMINI  [OSHW-LOGO-MINI]  84.12,37.44 0 bottom
LOGO25  OSHW-LOGOMINI  [OSHW-LOGO-MINI]  9.45,51.92 0 bottom
LOGO26  OSHW-LOGOMINI  [OSHW-LOGO-MINI]  20.12,51.92 0 bottom
LOGO27  OSHW-LOGOMINI  [OSHW-LOGO-MINI]  30.78,51.92 0 bottom
LOGO28  OSHW-LOGOMINI  [OSHW-LOGO-MINI]  41.45,51.92 0 bottom
LOGO29  OSHW-LOGOMINI  [OSHW-LOGO-MINI]  52.12,51.92 0 bottom
LOGO30  OSHW-LOGOMINI  [OSHW-LOGO-MINI]  62.79,51.92 0 bottom
LOGO31  OSHW-LOGOMINI  [OSHW-LOGO-MINI]  73.46,51.92 0 bottom
LOGO32  OSHW-LOGOMINI  [OSHW-LOGO-MINI]  84.12,51.92 0 bottom
U1  3.3V/600mA  [SOT23-5]  25.5,11.91 0 top
U2  3.3V/600mA  [SOT23-5]  14.83,11.91 0 top
U3  3.3V/600mA  [SOT23-5]  36.17,11.91 0 top
U4  3.3V/600mA  [SOT23-5]  46.84,11.91 0 top
U5  3.3V/600mA  [SOT23-5]  57.51,11.91 0 top
U6  3.3V/600mA  [SOT23-5]  68.17,11.91 0 top
U7  3.3V/600mA  [SOT23-5]  78.84,11.91 0 top
U8  3.3V/600mA  [SOT23-5]  89.51,11.91 0 top
U9  3.3V/600mA  [SOT23-5]  14.83,26.39 0 top
U10  3.3V/600mA  [SOT23-5]  25.5,26.39 0 top
U11  3.3V/600mA  [SOT23-5]  36.17,26.39 0 top
U12  3.3V/600mA  [SOT23-5]  46.84,26.39 0 top
U13  3.3V/600mA  [SOT23-5]  57.51,26.39 0 top
U14  3.3V/600mA  [SOT23-5]  68.17,26.39 0 top
U15  3.3V/600mA  [SOT23-5]  78.84,26.39 0 top
U16  3.3V/600mA  [SOT23-5]  89.51,26.39 0 top
U17  3.3V/600mA  [SOT23-5]  14.83,40.87 0 top
U18  3.3V/600mA  [SOT23-5]  25.5,40.87 0 top
U19  3.3V/600mA  [SOT23-5]  36.17,40.87 0 top
U20  3.3V/600mA  [SOT23-5]  46.84,40.87 0 top
U21  3.3V/600mA  [SOT23-5]  57.51,40.87 0 top
U22  3.3V/600mA  [SOT23-5]  68.17,40.87 0 top
U23  3.3V/600mA  [SOT23-5]  78.84,40.87 0 top
U24  3.3V/600mA  [SOT23-5]  89.51,40.87 0 top
U25  3.3V/600mA  [SOT23-5]  14.83,55.35 0 top
U26  3.3V/600mA  [SOT23-5]  25.5,55.35 0 top
U27  3.3V/600mA  [SOT23-5]  36.17,55.35 0 top
U28  3.3V/600mA  [SOT23-5]  46.84,55.35 0 top
U29  3.3V/600mA  [SOT23-5]  57.51,55.35 0 top
U30  3.3V/600mA  [SOT23-5]  68.17,55.35 0 top
U31  3.3V/600mA  [SOT23-5]  78.84,55.35 0 top
U32  3.3V/600mA  [SOT23-5]  89.51,55.35 0 top
U$1  SFE_LOGO_FLAME.1_INCH  [SFE_LOGO_FLAME_.1]  16.28,7.21 0 bottom
U$2  SFE_LOGO_FLAME.1_INCH  [SFE_LOGO_FLAME_.1]  26.95,7.21 0 bottom
U$3  [QWIIC_5MM]  10.29,8 0 top
U$4  [QWIIC_5MM]  20.95,8 0 top
U$5  SFE_LOGO_FLAME.1_INCH  [SFE_LOGO_FLAME_.1]  37.62,7.21 0 bottom
U$6  [QWIIC_5MM]  31.62,8 0 top
U$7  SFE_LOGO_FLAME.1_INCH  [SFE_LOGO_FLAME_.1]  48.29,7.21 0 bottom
U$8  [QWIIC_5MM]  42.29,8 0 top
U$9  SFE_LOGO_FLAME.1_INCH  [SFE_LOGO_FLAME_.1]  58.95,7.21 0 bottom
U$10  [QWIIC_5MM]  52.96,8 0 top
U$11  SFE_LOGO_FLAME.1_INCH  [SFE_LOGO_FLAME_.1]  69.62,7.21 0 bottom
U$12  [QWIIC_5MM]  63.63,8 0 top
U$13  SFE_LOGO_FLAME.1_INCH  [SFE_LOGO_FLAME_.1]  80.29,7.21 0 bottom
U$14  [QWIIC_5MM]  74.3,8 0 top
U$15  SFE_LOGO_FLAME.1_INCH  [SFE_LOGO_FLAME_.1]  90.96,7.21 0 bottom
U$16  [QWIIC_5MM]  84.96,8 0 top
U$17  SFE_LOGO_FLAME.1_INCH  [SFE_LOGO_FLAME_.1]  16.28,21.69 0 bottom
U$18  [QWIIC_5MM]  10.29,22.48 0 top
U$19  SFE_LOGO_FLAME.1_INCH  [SFE_LOGO_FLAME_.1]  26.95,21.69 0 bottom
U$20  [QWIIC_5MM]  20.95,22.48 0 top
U$21  SFE_LOGO_FLAME.1_INCH  [SFE_LOGO_FLAME_.1]  37.62,21.69 0 bottom
U$22  [QWIIC_5MM]  31.62,22.48 0 top
U$23  SFE_LOGO_FLAME.1_INCH  [SFE_LOGO_FLAME_.1]  48.29,21.69 0 bottom
U$24  [QWIIC_5MM]  42.29,22.48 0 top
U$25  SFE_LOGO_FLAME.1_INCH  [SFE_LOGO_FLAME_.1]  58.95,21.69 0 bottom
U$26  [QWIIC_5MM]  52.96,22.48 0 top
U$27  SFE_LOGO_FLAME.1_INCH  [SFE_LOGO_FLAME_.1]  69.62,21.69 0 bottom
U$28  [QWIIC_5MM]  63.63,22.48 0 top
U$29  SFE_LOGO_FLAME.1_INCH  [SFE_LOGO_FLAME_.1]  80.29,21.69 0 bottom
U$30  [QWIIC_5MM]  74.3,22.48 0 top
U$31  SFE_LOGO_FLAME.1_INCH  [SFE_LOGO_FLAME_.1]  90.96,21.69 0 bottom
U$32  [QWIIC_5MM]  84.96,22.48 0 top
U$33  SFE_LOGO_FLAME.1_INCH  [SFE_LOGO_FLAME_.1]  16.28,36.17 0 bottom
U$34  [QWIIC_5MM]  10.29,36.96 0 top
U$35  SFE_LOGO_FLAME.1_INCH  [SFE_LOGO_FLAME_.1]  26.95,36.17 0 bottom
U$36  [QWIIC_5MM]  20.95,36.96 0 top
U$37  SFE_LOGO_FLAME.1_INCH  [SFE_LOGO_FLAME_.1]  37.62,36.17 0 bottom
U$38  [QWIIC_5MM]  31.62,36.96 0 top
U$39  SFE_LOGO_FLAME.1_INCH  [SFE_LOGO_FLAME_.1]  48.29,36.17 0 bottom
U$40  [QWIIC_5MM]  42.29,36.96 0 top
U$41  SFE_LOGO_FLAME.1_INCH  [SFE_LOGO_FLAME_.1]  58.95,36.17 0 bottom
U$42  [QWIIC_5MM]  52.96,36.96 0 top
U$43  SFE_LOGO_FLAME.1_INCH  [SFE_LOGO_FLAME_.1]  69.62,36.17 0 bottom
U$44  [QWIIC_5MM]  63.63,36.96 0 top
U$45  SFE_LOGO_FLAME.1_INCH  [SFE_LOGO_FLAME_.1]  80.29,36.17 0 bottom
U$46  [QWIIC_5MM]  74.3,36.96 0 top
U$47  SFE_LOGO_FLAME.1_INCH  [SFE_LOGO_FLAME_.1]  90.96,36.17 0 bottom
U$48  [QWIIC_5MM]  84.96,36.96 0 top
U$49  SFE_LOGO_FLAME.1_INCH  [SFE_LOGO_FLAME_.1]  16.28,50.65 0 bottom
U$50  [QWIIC_5MM]  10.29,51.43 0 top
U$51  SFE_LOGO_FLAME.1_INCH  [SFE_LOGO_FLAME_.1]  26.95,50.65 0 bottom
U$52  [QWIIC_5MM]  20.95,51.43 0 top
U$53  SFE_LOGO_FLAME.1_INCH  [SFE_LOGO_FLAME_.1]  37.62,50.65 0 bottom
U$54  [QWIIC_5MM]  31.62,51.43 0 top
U$55  SFE_LOGO_FLAME.1_INCH  [SFE_LOGO_FLAME_.1]  48.29,50.65 0 bottom
U$56  [QWIIC_5MM]  42.29,51.43 0 top
U$57  SFE_LOGO_FLAME.1_INCH  [SFE_LOGO_FLAME_.1]  58.95,50.65 0 bottom
U$58  [QWIIC_5MM]  52.96,51.43 0 top
U$59  SFE_LOGO_FLAME.1_INCH  [SFE_LOGO_FLAME_.1]  69.62,50.65 0 bottom
U$60  [QWIIC_5MM]  63.63,51.43 0 top
U$61  SFE_LOGO_FLAME.1_INCH  [SFE_LOGO_FLAME_.1]  80.29,50.65 0 bottom
U$62  [QWIIC_5MM]  74.3,51.43 0 top
U$63  SFE_LOGO_FLAME.1_INCH  [SFE_LOGO_FLAME_.1]  90.96,50.65 0 bottom
U$64  [QWIIC_5MM]  84.96,51.43 0 top

## Library data of the parts
C1-C64 = SparkFun-Capacitors; PROD_ID: CAP-00868
E$1 E$2 FD1-FD128 LOGO1-LOGO32 U$1-U$64 = SparkFun-Aesthetics
E$3 = SparkFun-Retired
J1 J2 J4 J6 J8 J11 J13 J15 J17 J19 J21 J23 J25 J27 J29 J31 J33 J35 J37 J39 J41 J43 J45 J47 J49 J51 J53 J55 J57 J59 J61 J63 = SparkFun-Connectors; PROD_ID: CONN-13694
J3 J5 J7 J9 J10 J12 J14 J16 J18 J20 J22 J24 J26 J28 J30 J32 J34 J36 J38 J40 J42 J44 J46 J48 J50 J52 J54 J56 J58 J60 J62 J64 = Qwiic Pi SHIM
U1-U32 = SparkFun-IC-Power; PROD_ID: VREG-12457

## Nets
3.3V: C3.1 J1.2 U2.5
3.3V1: C4.1 J2.2 U1.5
3.3V2: C6.1 J4.2 U3.5
3.3V3: C8.1 J6.2 U4.5
3.3V4: C10.1 J8.2 U5.5
3.3V5: C12.1 J11.2 U6.5
3.3V6: C14.1 J13.2 U7.5
3.3V7: C16.1 J15.2 U8.5
3.3V8: C18.1 J17.2 U9.5
3.3V9: C20.1 J19.2 U10.5
3.3V10: C22.1 J21.2 U11.5
3.3V11: C24.1 J23.2 U12.5
3.3V12: C26.1 J25.2 U13.5
3.3V13: C28.1 J27.2 U14.5
3.3V14: C30.1 J29.2 U15.5
3.3V15: C32.1 J31.2 U16.5
3.3V16: C34.1 J33.2 U17.5
3.3V17: C36.1 J35.2 U18.5
3.3V18: C38.1 J37.2 U19.5
3.3V19: C40.1 J39.2 U20.5
3.3V20: C42.1 J41.2 U21.5
3.3V21: C44.1 J43.2 U22.5
3.3V22: C46.1 J45.2 U23.5
3.3V23: C48.1 J47.2 U24.5
3.3V24: C50.1 J49.2 U25.5
3.3V25: C52.1 J51.2 U26.5
3.3V26: C54.1 J53.2 U27.5
3.3V27: C56.1 J55.2 U28.5
3.3V28: C58.1 J57.2 U29.5
3.3V29: C60.1 J59.2 U30.5
3.3V30: C62.1 J61.2 U31.5
3.3V31: C64.1 J63.2 U32.5
5V: C1.1 J9.2 J9.4 U2.1 U2.3
5V1: C2.1 J3.2 J3.4 U1.1 U1.3
5V2: C5.1 J5.2 J5.4 U3.1 U3.3
5V3: C7.1 J7.2 J7.4 U4.1 U4.3
5V4: C9.1 J10.2 J10.4 U5.1 U5.3
5V5: C11.1 J12.2 J12.4 U6.1 U6.3
5V6: C13.1 J14.2 J14.4 U7.1 U7.3
5V7: C15.1 J16.2 J16.4 U8.1 U8.3
5V8: C17.1 J18.2 J18.4 U9.1 U9.3
5V9: C19.1 J20.2 J20.4 U10.1 U10.3
5V10: C21.1 J22.2 J22.4 U11.1 U11.3
5V11: C23.1 J24.2 J24.4 U12.1 U12.3
5V12: C25.1 J26.2 J26.4 U13.1 U13.3
5V13: C27.1 J28.2 J28.4 U14.1 U14.3
5V14: C29.1 J30.2 J30.4 U15.1 U15.3
5V15: C31.1 J32.2 J32.4 U16.1 U16.3
5V16: C33.1 J34.2 J34.4 U17.1 U17.3
5V17: C35.1 J36.2 J36.4 U18.1 U18.3
5V18: C37.1 J38.2 J38.4 U19.1 U19.3
5V19: C39.1 J40.2 J40.4 U20.1 U20.3
5V20: C41.1 J42.2 J42.4 U21.1 U21.3
5V21: C43.1 J44.2 J44.4 U22.1 U22.3
5V22: C45.1 J46.2 J46.4 U23.1 U23.3
5V23: C47.1 J48.2 J48.4 U24.1 U24.3
5V24: C49.1 J50.2 J50.4 U25.1 U25.3
5V25: C51.1 J52.2 J52.4 U26.1 U26.3
5V26: C53.1 J54.2 J54.4 U27.1 U27.3
5V27: C55.1 J56.2 J56.4 U28.1 U28.3
5V28: C57.1 J58.2 J58.4 U29.1 U29.3
5V29: C59.1 J60.2 J60.4 U30.1 U30.3
5V30: C61.1 J62.2 J62.4 U31.1 U31.3
5V31: C63.1 J64.2 J64.4 U32.1 U32.3
GND [vcc]: C1.2 C3.2 J1.1 J9.6 U2.2
GND1 [vcc]: C2.2 C4.2 J2.1 J3.6 U1.2
GND2 [vcc]: C5.2 C6.2 J4.1 J5.6 U3.2
GND3 [vcc]: C7.2 C8.2 J6.1 J7.6 U4.2
GND4 [vcc]: C9.2 C10.2 J8.1 J10.6 U5.2
GND5 [vcc]: C11.2 C12.2 J11.1 J12.6 U6.2
GND6 [vcc]: C13.2 C14.2 J13.1 J14.6 U7.2
GND7 [vcc]: C15.2 C16.2 J15.1 J16.6 U8.2
GND8 [vcc]: C17.2 C18.2 J17.1 J18.6 U9.2
GND9 [vcc]: C19.2 C20.2 J19.1 J20.6 U10.2
GND10 [vcc]: C21.2 C22.2 J21.1 J22.6 U11.2
GND11 [vcc]: C23.2 C24.2 J23.1 J24.6 U12.2
GND12 [vcc]: C25.2 C26.2 J25.1 J26.6 U13.2
GND13 [vcc]: C27.2 C28.2 J27.1 J28.6 U14.2
GND14 [vcc]: C29.2 C30.2 J29.1 J30.6 U15.2
GND15 [vcc]: C31.2 C32.2 J31.1 J32.6 U16.2
GND16 [vcc]: C33.2 C34.2 J33.1 J34.6 U17.2
GND17 [vcc]: C35.2 C36.2 J35.1 J36.6 U18.2
GND18 [vcc]: C37.2 C38.2 J37.1 J38.6 U19.2
GND19 [vcc]: C39.2 C40.2 J39.1 J40.6 U20.2
GND20 [vcc]: C41.2 C42.2 J41.1 J42.6 U21.2
GND21 [vcc]: C43.2 C44.2 J43.1 J44.6 U22.2
GND22 [vcc]: C45.2 C46.2 J45.1 J46.6 U23.2
GND23 [vcc]: C47.2 C48.2 J47.1 J48.6 U24.2
GND24 [vcc]: C49.2 C50.2 J49.1 J50.6 U25.2
GND25 [vcc]: C51.2 C52.2 J51.1 J52.6 U26.2
GND26 [vcc]: C53.2 C54.2 J53.1 J54.6 U27.2
GND27 [vcc]: C55.2 C56.2 J55.1 J56.6 U28.2
GND28 [vcc]: C57.2 C58.2 J57.1 J58.6 U29.2
GND29 [vcc]: C59.2 C60.2 J59.1 J60.6 U30.2
GND30 [vcc]: C61.2 C62.2 J61.1 J62.6 U31.2
GND31 [vcc]: C63.2 C64.2 J63.1 J64.6 U32.2
NC: J9.1
NC1: J3.1
NC2: J5.1
NC3: J7.1
NC4: J10.1
NC5: J12.1
NC6: J14.1
NC7: J16.1
NC8: J18.1
NC9: J20.1
NC10: J22.1
NC11: J24.1
NC12: J26.1
NC13: J28.1
NC14: J30.1
NC15: J32.1
NC16: J34.1
NC17: J36.1
NC18: J38.1
NC19: J40.1
NC20: J42.1
NC21: J44.1
NC22: J46.1
NC23: J48.1
NC24: J50.1
NC25: J52.1
NC26: J54.1
NC27: J56.1
NC28: J58.1
NC29: J60.1
NC30: J62.1
NC31: J64.1
SCL: J1.4 J9.5
SCL1: J2.4 J3.5
SCL2: J4.4 J5.5
SCL3: J6.4 J7.5
SCL4: J8.4 J10.5
SCL5: J11.4 J12.5
SCL6: J13.4 J14.5
SCL7: J15.4 J16.5
SCL8: J17.4 J18.5
SCL9: J19.4 J20.5
SCL10: J21.4 J22.5
SCL11: J23.4 J24.5
SCL12: J25.4 J26.5
SCL13: J27.4 J28.5
SCL14: J29.4 J30.5
SCL15: J31.4 J32.5
SCL16: J33.4 J34.5
SCL17: J35.4 J36.5
SCL18: J37.4 J38.5
SCL19: J39.4 J40.5
SCL20: J41.4 J42.5
SCL21: J43.4 J44.5
SCL22: J45.4 J46.5
SCL23: J47.4 J48.5
SCL24: J49.4 J50.5
SCL25: J51.4 J52.5
SCL26: J53.4 J54.5
SCL27: J55.4 J56.5
SCL28: J57.4 J58.5
SCL29: J59.4 J60.5
SCL30: J61.4 J62.5
SCL31: J63.4 J64.5
SDA: J1.3 J9.3
SDA1: J2.3 J3.3
SDA2: J4.3 J5.3
SDA3: J6.3 J7.3
SDA4: J8.3 J10.3
SDA5: J11.3 J12.3
SDA6: J13.3 J14.3
SDA7: J15.3 J16.3
SDA8: J17.3 J18.3
SDA9: J19.3 J20.3
SDA10: J21.3 J22.3
SDA11: J23.3 J24.3
SDA12: J25.3 J26.3
SDA13: J27.3 J28.3
SDA14: J29.3 J30.3
SDA15: J31.3 J32.3
SDA16: J33.3 J34.3
SDA17: J35.3 J36.3
SDA18: J37.3 J38.3
SDA19: J39.3 J40.3
SDA20: J41.3 J42.3
SDA21: J43.3 J44.3
SDA22: J45.3 J46.3
SDA23: J47.3 J48.3
SDA24: J49.3 J50.3
SDA25: J51.3 J52.3
SDA26: J53.3 J54.3
SDA27: J55.3 J56.3
SDA28: J57.3 J58.3
SDA29: J59.3 J60.3
SDA30: J61.3 J62.3
SDA31: J63.3 J64.3